# Altium PCB smd.PcbDoc
Units mm, origin at the board's own origin, x right, y up, seen from the top; angles counter-clockwise.
Board outline 152.4 x 101.6 mm, 2 copper layers (Top Layer, Bottom Layer); 61 components, 107 nets, 188 pads, 33 vias.
Unrouted connection lines stored in the file: 6.
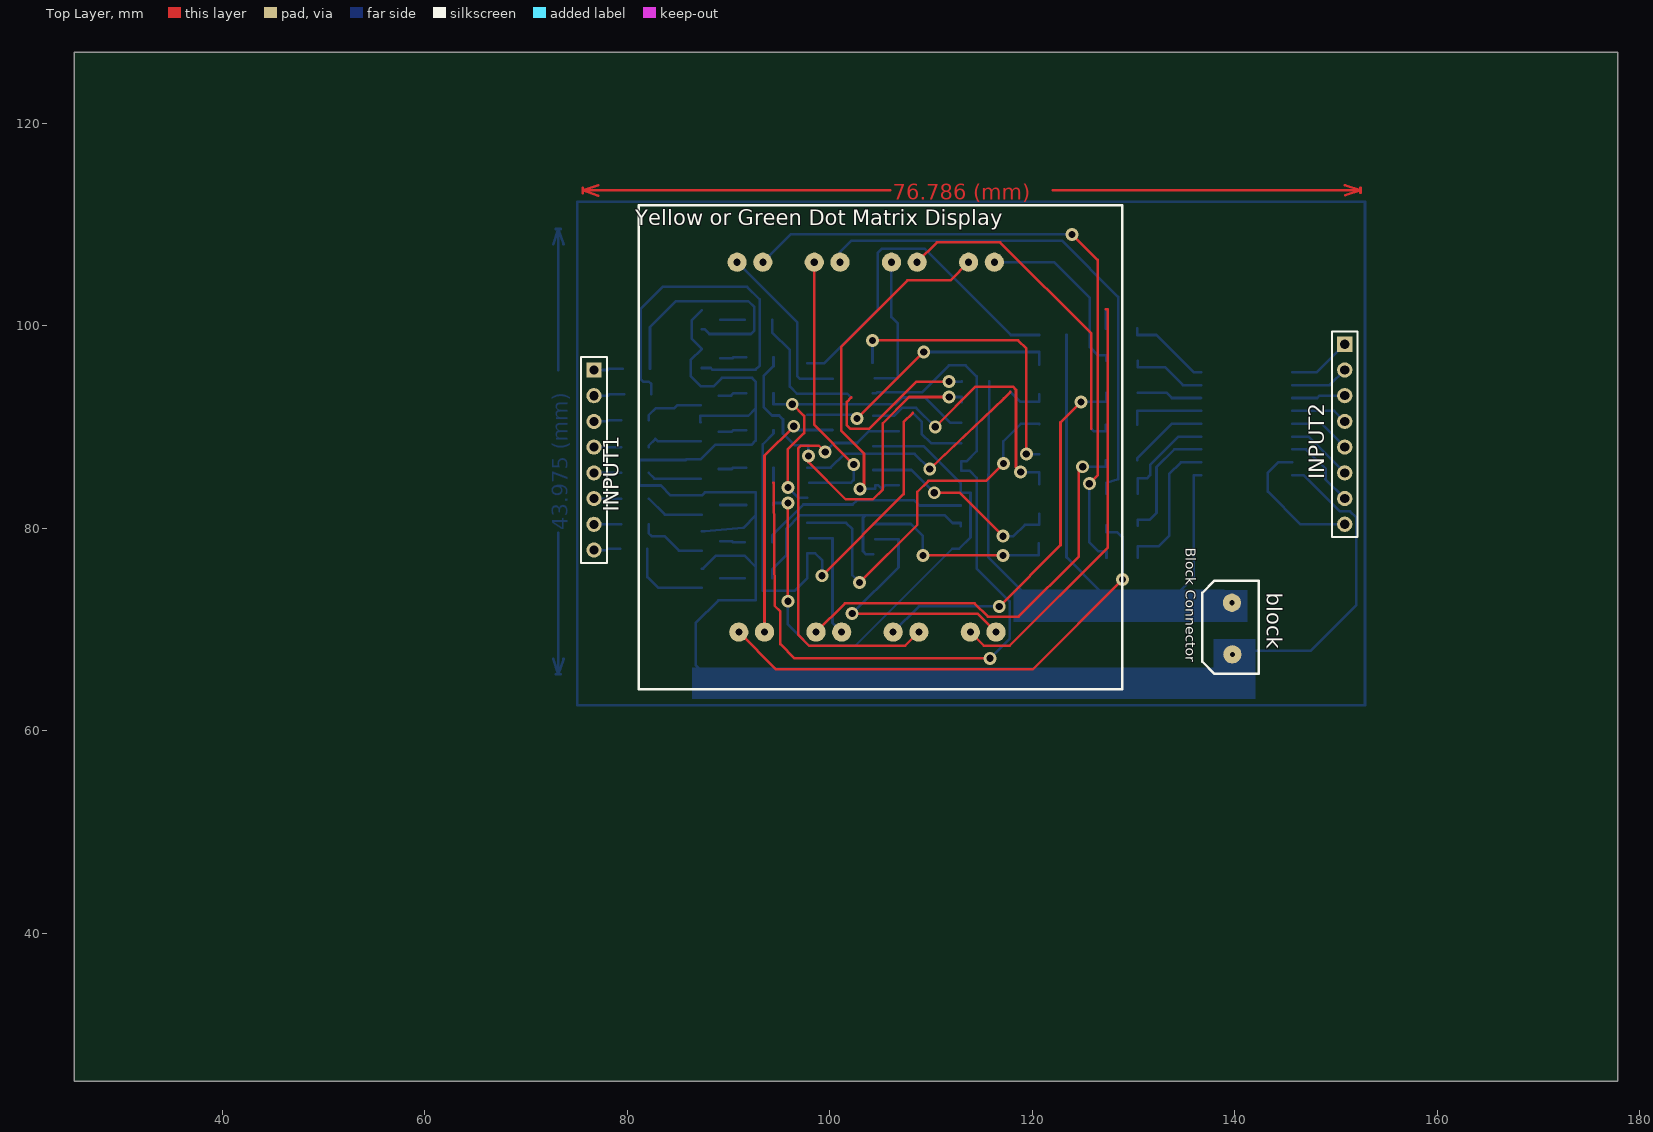
[diagram p0: Top Layer view]
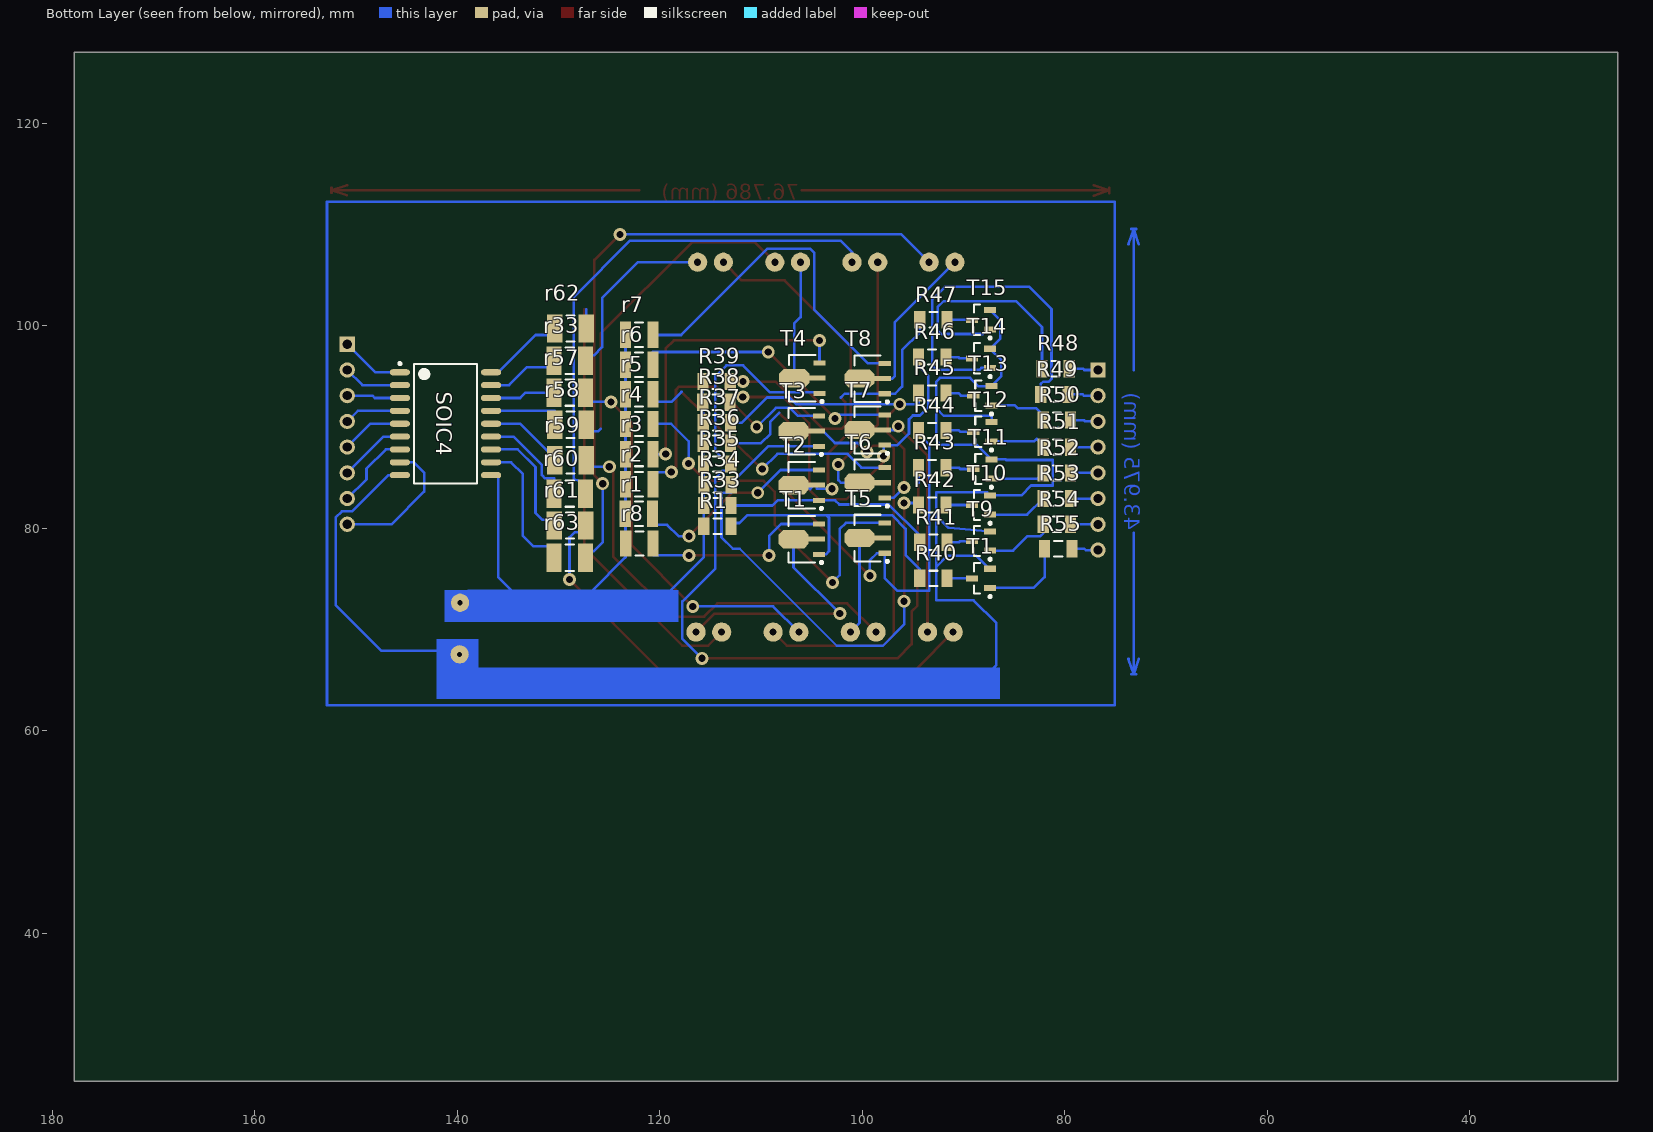
[diagram p1: Bottom Layer view, seen from below]

## Layer stack, top to bottom
Top Layer: signal copper 0.0356
Dielectric: dielectric 0.32, FR-4, Dk 4.8
Bottom Layer: signal copper 0.0356

## Board outline
25.4,25.4 177.8,25.4 177.8,127 25.4,127

## Design rules (kind name [scope] priority, off if disabled: settings)
Clearance [All] p1: gap=0.254
PolygonConnect [All] p1: connectstyle=Relief reliefconductorwidth=0.254 reliefentries=4 polygonreliefangle="90 Angle"
RoutingVias [All] p1: holewidth=0.711 width=1.27 viastyle="Through Hole" minholewidth=0.711 minwidth=1.27 maxholewidth=0.711 maxwidth=1.27
SilkscreenOverComponentPads [All] p1: minsilkscreentomaskgap=0.254
SolderMaskExpansion [All] p1: expansion=0.102
Width [All] p1: maxlimit=0.254 minlimit=0.254 preferedwidth=0.254
27 further rules are at their usual default settings.

## Components (designator, comment, footprint, x,y, rotation, side; value= is the part's Value field where it differs from the comment)
block "Comment" "PCB Block Connector" 139.725,70.1 r270 top
INPUT1 "Comment" HDR1X8 76.708,95.631 r270 top
INPUT2 "Comment" HDR1X8 150.85,98.175 r270 top
r1 "Comment" RESC3225L 122.05,81.425 r0 bottom
R1 "Comment" RESC3216L 114.299,80.206 r0 bottom
r2 "Comment" RESC3225L 122.025,84.35 r0 bottom
r3 "Comment" RESC3225L 122.025,87.325 r0 bottom
r4 "Comment" RESC3225L 122.025,90.3 r0 bottom
r5 "Comment" RESC3225L 122.025,93.225 r0 bottom
r6 "Comment" RESC3225L 122.025,96.15 r0 bottom
r7 "Comment" RESC3225L 122.025,99.1 r0 bottom
r8 "Comment" RESC3225L 122,78.5 r0 bottom
R33 "Comment" RESC3216L 114.3,82.25 r0 bottom
r33 "Comment" RESC3225M 128.875,96.55 r180 bottom
R34 "Comment" RESC3216L 114.275,84.3 r0 bottom
R35 "Comment" RESC3216L 114.325,86.35 r0 bottom
R36 "Comment" RESC3216L 114.35,88.4 r0 bottom
R37 "Comment" RESC3216L 114.35,90.425 r0 bottom
R38 "Comment" RESC3216L 114.4,92.45 r0 bottom
R39 "Comment" RESC3216L 114.375,94.5 r0 bottom
R40 "Comment" RESC3216L 92.964,75.057 r0 bottom
R41 "Comment" RESC3216L 92.964,78.613 r0 bottom
R42 "Comment" RESC3216L 93.091,82.296 r0 bottom
R43 "Comment" RESC3216L 93.091,85.979 r0 bottom
R44 "Comment" RESC3216L 93.091,89.662 r0 bottom
R45 "Comment" RESC3216L 93.091,93.345 r0 bottom
R46 "Comment" RESC3216L 93.091,96.901 r0 bottom
R47 "Comment" RESC3216L 92.964,100.584 r0 bottom
R48 "Comment" RESC3216L 80.899,95.758 r180 bottom
R49 "Comment" RESC3216L 81.026,93.218 r180 bottom
R50 "Comment" RESC3216L 80.772,90.678 r180 bottom
R51 "Comment" RESC3216L 80.772,88.011 r180 bottom
R52 "Comment" RESC3216L 80.772,85.471 r180 bottom
R53 "Comment" RESC3216L 80.772,82.931 r180 bottom
R54 "Comment" RESC3216L 80.772,80.391 r180 bottom
R55 "Comment" RESC3216L 80.645,77.978 r180 bottom
r57 "Comment" RESC3225M 128.875,93.4 r180 bottom
r58 "Comment" RESC3225M 128.8,90.225 r180 bottom
r59 "Comment" RESC3225M 128.8,86.725 r180 bottom
r60 "Comment" RESC3225M 128.875,83.425 r180 bottom
r61 "Comment" RESC3225M 128.85,80.275 r180 bottom
r62 "Comment" RESC3225M 128.8,99.725 r180 bottom
r63 "Comment" RESC3225M 128.875,77.1 r180 bottom
SOIC4 "Comment" SOIC127P1030-18L 141.15,90.325 r180 bottom
T1 "Comment" SOT89L 105.981,78.924 r0 bottom
T1 "Comment" SOT23-3L 88.265,75.057 r0 bottom
T2 "Comment" SOT89L 105.981,84.258 r0 bottom
T3 "Comment" SOT89L 105.981,89.592 r0 bottom
T4 "Comment" SOT89L 105.925,94.825 r0 bottom
T5 "Comment" SOT89L 99.47,79.035 r0 bottom
T6 "Comment" SOT89L 99.47,84.496 r0 bottom
T7 "Comment" SOT89L 99.47,89.703 r0 bottom
T8 "Comment" SOT89L 99.47,94.783 r0 bottom
T9 "Comment" SOT23-3L 88.265,78.74 r0 bottom
T10 "Comment" SOT23-3L 88.265,82.296 r0 bottom
T11 "Comment" SOT23-3L 88.138,85.852 r0 bottom
T12 "Comment" SOT23-3L 88.138,89.535 r0 bottom
T13 "Comment" SOT23-3L 88.138,93.091 r0 bottom
T14 "Comment" SOT23-3L 88.265,96.774 r0 bottom
T15 "Comment" SOT23-3L 88.265,100.584 r0 bottom
? "Comment" "Yellow or Green Dot Matrix DIsplay" 104.902,88.011 r0 top locked

## Footprints (in the part's own frame and the unit in brackets; to place one, negate y for a bottom-side part, rotate by r counter-clockwise, add the part's x,y. Pads: shape width x height; smd on the part's side, far side on the other; paste and mask are expansions set on the pad)
HDR1X8 [mm]
  rect 1.5x1.5 hole 0.9: 1(0,0)
  round 1.5 hole 0.9: 2(2.54,0) 3(5.08,0) 4(7.62,0) 5(10.16,0) 6(12.7,0) 7(15.24,0) 8(17.78,0)
  silkscreen extent -1.27,-1.27 19.05,1.27
"PCB Block Connector" [mm]
  round 1.8 hole 0.5: 1(-2.547,-0.023) 2(2.547,0.023)
  silkscreen extent -4.7,-2.94 4.45,2.65
RESC3216L [mm] "Chip Resistor, Body 3.2x1.6mm, IPC High Density"
  rect 1.1x1.7 smd: 1(-1.35,0) 2(1.35,0)
  silkscreen extent -0.4,-0.75 0.4,0.75, body extent -1.68,-0.87 1.68,0.87, height 0.71
RESC3225L [mm] "Chip Resistor, Body 3.2x2.5mm, IPC High Density"
  rect 1.1x2.6 smd: 1(-1.35,0) 2(1.35,0)
  silkscreen extent -0.4,-1.2 0.4,1.2, body extent -1.68,-1.32 1.68,1.32, height 0.71
RESC3225M [mm] "Chip Resistor, Body 3.2x2.5mm, IPC Low Density"
  rect 1.5x2.8 smd: 1(-1.55,0) 2(1.55,0)
  silkscreen extent -0.4,-1.3 0.4,1.3, body extent -1.68,-1.32 1.68,1.32, height 0.71
SOIC127P1030-18L [mm] "SOIC, 18-Leads, Body 11.6x7.5mm, Pitch 1.27mm, IPC High Density"
  oval 2x0.6 smd: 1(-4.5,5.08) 2(-4.5,3.81) 3(-4.5,2.54) 4(-4.5,1.27) 5(-4.5,0) 6(-4.5,-1.27) 7(-4.5,-2.54) 8(-4.5,-3.81) 9(-4.5,-5.08) 10(4.5,-5.08) 11(4.5,-3.81) 12(4.5,-2.54) 13(4.5,-1.27) 14(4.5,0) 15(4.5,1.27) 16(4.5,2.54) 17(4.5,3.81) 18(4.5,5.08)
  silkscreen extent -4.62,-5.9 3.1,6.05, body extent -3.8,-5.95 3.8,5.95, height 2.65
SOT23-3L [mm] "SOT23, 3-Leads, Body 2.9x1.3mm, Pitch 0.95mm, Lead Span 2.5mm, IPC High Density"
  rect 1.2x0.6 smd: 1(-0.9,0.95) 2(-0.9,-0.95) 3(0.9,0)
  silkscreen extent -1.02,-1.5 0.7,1.92, body extent -0.7,-1.5 0.7,1.5, height 1.1
SOT89L [mm] "SOT89, 3-Leads, Body 4.5x2.4 mm, Pitch 1.5mm, Lead Span 4.1mm, IPC High Density"
  rect 1.2x0.5 smd: 1(-1.7,1.5) 3(-1.7,-1.5)
  rect 1.6x0.5 smd: 2(-1.5,0)
  oct 3x1.8 smd: 2(0.8,0)
  silkscreen extent -2.07,-2.3 1.3,2.42, body extent -1.3,-2.3 1.3,2.3, height 1.6
"Yellow or Green Dot Matrix DIsplay" [mm] "Y or G Dot Matrix"
  round 1.9 hole 0.7: 3(-13.886,-18.262) 4(-11.346,-18.262) 6(-6.266,-18.262) 7(-3.726,-18.262) 9(1.354,-18.262) 10(3.894,-18.262) 12(8.974,-18.262) 13(11.514,-18.262) 20(11.346,18.262) 21(8.806,18.262) 23(3.726,18.262) 24(1.186,18.262) 26(-3.894,18.262) 27(-6.434,18.262) 29(-11.514,18.262) 30(-14.054,18.262)
  silkscreen extent -23.78,-23.9 23.99,23.89

## Via types
v1: diameter 1.27, hole 0.711, Top Layer to Bottom Layer, 33 vias

## Nets (pads, with @x,y where several pads share a name; then routed paths per layer and width w, separated by ;. In a path a pad name is that pad's centre, name@x,y a point inside that pad or via, vN(x,y) a via of type N, cw(c..) or ccw(c..) an arc to the next point about the centre after c; other vN are vias at no path point)
A1: r63.1 SOIC4.11 | length 14.4
  Bottom Layer w0.254: r63.1 130.425,78.232 132.486,78.232 133.502,79.248 133.502,85.344 134.673,86.515 SOIC4.11
A2: r61.1 SOIC4.12 | length 12.3
  Bottom Layer w0.254: r61.1 130.4,80.823 131.572,80.823 132.258,81.509 132.258,86.03 134.013,87.785 SOIC4.12
A3: r60.1 SOIC4.13 | length 10
  Bottom Layer w0.254: r60.1 130.425,84.938 131.318,84.938 131.623,85.242 131.623,86.233 134.445,89.055 SOIC4.13
A4: r59.1 SOIC4.14 | length 7.9
  Bottom Layer w0.254: r59.1 130.35,86.88 133.795,90.325 SOIC4.14
A5: r58.1 SOIC4.15 | length 7.7
  Bottom Layer w0.254: r58.1 130.35,91.595 SOIC4.15
A6: r57.1 SOIC4.16 | length 6.4
  Bottom Layer w0.254: r57.1 133.248,93.4 133.783,92.865 SOIC4.16
A7: r33.1 SOIC4.17 | length 7.6
  Bottom Layer w0.254: r33.1 130.425,95.91 133.096,95.91 134.871,94.135 SOIC4.17
A8: r62.1 SOIC4.18 | length 8.5
  Bottom Layer w0.254: r62.1 130.35,99.085 132.26,99.085 135.941,95.405 SOIC4.18
A9: 
A10: 
A11: 
A12: 
A13: 
A14: 
A15: 
A16: 
A17: 
A18: 
A19: 
A20: 
A21: 
A22: 
A23: 
A24: 
b1: R39.1 R47.2 T8.1 | length 30.2
  Top Layer w0.254: 102.108,92.913 101.676,92.481 101.676,90.17 102.032,89.814 103.886,89.814 108.56,94.488 v1(111.76,94.488)
  Bottom Layer w0.254: R47.2 94.314,99.336 96.063,97.587 96.063,93.98 96.76,93.283 T8.1 101.738,93.283 102.108,92.913 ; v1(111.76,94.488) 113.025,94.488 R39.1
b2: R38.1 R46.2 T7.1 | length 39
  Top Layer w0.254: v1(97.892,87.147) 97.892,86.538 101.575,82.855 104.242,82.855 105.232,83.845 105.232,90.371 107.825,92.964 v1(111.785,92.964)
  Bottom Layer w0.254: R46.2 94.441,96.012 93.497,95.068 93.497,91.948 94.31,91.135 94.996,91.135 95.377,90.754 95.377,89.346 96.52,88.203 T7.1 97.892,88.203 v1(97.892,87.147) ; v1(111.785,92.964) 113.05,92.964 R38.1
b3: R37.1 R45.2 T6.1 | length 32.7
  Top Layer w0.254: v1(95.86,84.023) 95.86,87.808 97.46,89.408 97.46,91.084 v1(96.291,92.253)
  Bottom Layer w0.254: R45.2 94.441,92.253 v1(96.291,92.253) 106.528,92.253 107.188,92.913 109.398,92.913 111.887,90.424 R37.1 ; v1(95.86,84.023) 96.887,82.996 T6.1
b4: R36.1 R44.2 T5.1 | length 53.5
  Top Layer w0.254: v1(99.238,75.311) 107.29,83.363 107.29,90.475 108.204,91.389
  Bottom Layer w0.254: R44.2 94.441,89.357 93.383,88.299 93.383,73.812 96.52,73.812 97.77,75.062 T5.1 98.552,77.535 99.238,76.849 v1(99.238,75.311) ; 108.204,91.389 109.068,90.526 109.068,89.332 109.999,88.4 R36.1
b5: R35.1 R43.2 T4.1 | length 82.9
  Top Layer w0.254: 94.441,84.51 94.459,84.51 94.564,72.333 95.117,71.78 95.117,68.56 96.52,67.158 v1(115.824,67.158)
  Bottom Layer w0.254: 94.441,84.51 R43.2 ; T4.1 104.572,93.325 104.668,93.421 109.093,93.421 111.76,96.088 113.411,96.088 114.503,94.996 114.503,87.605 113.538,86.639 112.975,86.639 R35.1 112.975,85.7 113.792,85.7 114.503,84.988 114.503,76.022 117.754,72.771 117.754,69.088 v1(115.824,67.158)
b6: R34.1 R42.2 T3.1 | length 53.4
  Top Layer w0.254: v1(95.86,72.796) v1(95.86,82.499)
  Bottom Layer w0.254: R42.2 94.441,82.499 v1(95.86,82.499) ; v1(95.86,72.796) 95.86,70.51 97.968,68.402 102.514,68.402 112.09,77.978 112.776,77.978 113.894,79.096 113.894,83.49 112.925,83.49 R34.1 112.925,84.455 109.288,88.092 T3.1
b7: R33.1 R41.2 T2.1 | length 21
  Bottom Layer w0.254: R41.2 94.314,79.277 97.384,82.347 102.256,82.347 102.667,82.758 T2.1 108.356,82.758 108.864,82.25 R33.1
b8: R1.1 R40.2 T1.1@104.281,77.424 | length 28.7
  Bottom Layer w0.254: R40.2 94.314,75.946 95.707,77.339 95.707,79.952 97.061,81.305 103.556,81.305 ; T1.1@104.281,77.424 103.591,77.424 103.276,77.739 103.276,81.026 103.556,81.305 ; R1.1 112.949,80.518 112.116,80.518 111.328,81.305 103.556,81.305
c1: ?.30 T8.2 | length 17.3
  Bottom Layer w0.254: ?.30 96.774,100.347 96.774,95.037 97.028,94.783 97.97,94.783 T8.2@100.27,94.783
c2: ?.4 T7.2 | length 25.5
  Top Layer w0.254: ?.4 93.556,87.18 v1(96.444,90.068)
  Bottom Layer w0.254: v1(96.444,90.068) 96.809,89.703 97.97,89.703 T7.2@100.27,89.703
c3: ?.27 T6.2 | length 27.6
  Top Layer w0.254: ?.27 98.468,90.203 v1(102.362,86.309)
  Bottom Layer w0.254: T6.2@97.97,84.496 100.27,84.496 102.108,84.496 102.362,84.75 v1(102.362,86.309)
c4: ?.7 T5.2 | length 12
  Bottom Layer w0.254: T5.2@97.97,79.035 100.27,79.035 100.27,70.655 ?.7
c5: ?.24 T4.2 | length 14
  Bottom Layer w0.254: T4.2@104.425,94.825 106.725,94.825 106.725,100.228 106.088,100.865 ?.24
c6: ?.10 T3.2 | length 42.5
  Top Layer w0.254: v1(99.543,87.528) 98.908,88.163 97.155,88.163 96.876,87.884 96.876,69.494 97.968,68.402 107.449,68.402 ?.10
  Bottom Layer w0.254: v1(99.543,87.528) 100.432,88.417 102.692,88.417 103.867,89.592 104.481,89.592 T3.2@106.781,89.592
c7: ?.21 T2.2 | length 35.7
  Top Layer w0.254: v1(102.972,83.896) 103.378,84.303 103.378,87.376 101.117,89.637 101.117,97.917 107.671,104.47 111.906,104.47 ?.21
  Bottom Layer w0.254: v1(102.972,83.896) 104.481,83.896 104.481,84.258 104.754,84.258 105.138,83.874 105.523,84.258 T2.2@106.781,84.258
c8: ?.13 T1.2@104.481,78.924 T1.2@106.781,78.924 | length 26.5
  Top Layer w0.254: v1(102.21,71.577) 114.587,71.577 ?.13
  Bottom Layer w0.254: v1(102.21,71.577) 106.782,76.149 106.782,78.924 T1.2@104.481,78.924
COM: block.1 r1.2 R1.2 r2.2 r3.2 r4.2 r5.2 r6.2 r7.2 r8.2 R33.2 R34.2 R35.2 R36.2 R37.2 R38.2 R39.2 SOIC4.10 | length 88.2
  Bottom Layer w0.254: R39.2 115.725,93.472 115.75,93.447 R38.2 115.75,91.439 115.7,91.389 R37.2 R36.2 115.7,87.376 115.675,87.351 R35.2 115.675,85.343 115.625,85.293 R34.2 115.625,83.286 115.65,83.261 R33.2 115.65,81.205 115.649,81.204 R1.2 115.649,77.137 118.974,73.812 126.703,73.812 ; r8.2 123.35,77.165 123.375,77.14 ; r7.2 r6.2 r5.2 r4.2 r3.2 r2.2 123.375,77.14 ; r1.2 123.4,77.115 ; SOIC4.10 135.941,85.245 135.941,75.184 134.569,73.812 ; block.1@139.702,73.022 138.912,73.812 134.569,73.812 ; 123.375,77.14 123.4,77.115 ; 123.4,77.115 126.703,73.812 ; 126.703,73.812 134.569,73.812
e1: r7.1 T8.3 | length 34.4
  Bottom Layer w0.254: T8.3 99.416,96.283 104.75,101.617 104.75,107.213 105.156,107.62 109.347,107.62 117.881,99.085 120.675,99.085 r7.1
e2: r6.1 T7.3 | length 27
  Top Layer w0.254: v1(102.692,90.83) v1(109.271,97.409)
  Bottom Layer w0.254: T7.3 102.32,91.203 v1(102.692,90.83) ; v1(109.271,97.409) 120.675,97.409 r6.1
e3: r5.1 T6.3 | length 28.3
  Top Layer w0.254: v1(109.872,85.861) 117.187,92.829 117.831,93.472
  Bottom Layer w0.254: T6.3 100.076,85.996 101.431,87.351 108.382,87.351 v1(109.872,85.861) ; 117.831,93.472 117.856,93.472 118.847,92.481 120.675,92.481 r5.1
e4: r4.1 T5.3 | length 37.7
  Top Layer w0.254: v1(102.946,74.651) 108.636,80.34 108.636,83.591 109.728,84.684 115.418,84.684 v1(117.145,86.411)
  Bottom Layer w0.254: T5.3 101.608,80.535 102.235,79.908 102.235,75.362 v1(102.946,74.651) ; v1(117.145,86.411) 117.145,88.595 118.872,90.322 120.675,90.322 r4.1
e5: r3.1 T4.3 | length 29.4
  Top Layer w0.254: v1(104.216,98.552) 118.593,98.552 119.405,97.739 v1(119.405,87.325)
  Bottom Layer w0.254: v1(104.216,98.552) 104.216,96.325 T4.3 ; v1(119.405,87.325) r3.1
e6: r2.1 T3.3 | length 28.3
  Top Layer w0.254: v1(110.414,90.018) 114.376,93.98 118.085,93.98 118.389,93.675 118.389,86.004 v1(118.847,85.547)
  Bottom Layer w0.254: T3.3 106.332,91.092 107.137,91.897 108.534,91.897 v1(110.414,90.018) ; v1(118.847,85.547) 120.675,85.547 r2.1
e7: r1.1 T2.3 | length 20.7
  Top Layer w0.254: v1(110.312,83.515) 112.801,83.515 v1(117.094,79.223)
  Bottom Layer w0.254: T2.3 108.069,85.758 v1(110.312,83.515) ; v1(117.094,79.223) 118.135,79.223 119.253,80.34 120.7,80.34 r1.1
e8: r8.1 T1.3@104.281,80.424 | length 20
  Top Layer w0.254: v1(109.195,77.318) v1(117.094,77.318)
  Bottom Layer w0.254: T1.3@104.281,80.424 108.019,80.424 109.195,79.248 v1(109.195,77.318) ; v1(117.094,77.318) 120.65,77.318 r8.1
GND: block.2 SOIC4.9 T1.2@87.365,76.007 T9.2 T10.2 T11.2 T12.2 T13.2 T14.2 T15.2 | length 169.6
  Bottom Layer w0.254: T12.2 87.224,90.485 87.224,91.11 91.948,91.11 92.685,91.846 ; T1.2@87.365,76.007 87.478,76.007 88.763,77.292 91.592,77.292 92.685,76.2 ; T9.2 87.655,79.69 91.465,80.035 92.685,81.255 ; T15.2 86.36,100.529 86.36,98.729 T14.2 86.258,96.617 86.258,95.021 T13.2 88.544,94.041 89.347,94.844 92.329,94.844 92.685,94.488 92.685,91.846 ; 137.045,65.225 88.025,65.225 86.75,66.5 86.75,70.625 89.008,72.883 92.685,72.883 92.685,76.2 ; block.2@139.748,67.928 147.502,67.928 151.994,72.419 151.994,81.051 151.384,81.661 150.368,81.661 146.784,85.245 SOIC4.9 ; 92.685,76.2 92.685,81.255 ; 92.685,81.255 92.685,83.541 87.66,83.541 T10.2 84.292,83.246 83.312,84.226 81.178,84.226 81.178,86.741 85.776,86.741 85.837,86.802 T11.2 88.676,88.24 92.278,88.24 92.685,88.646 92.685,91.846
I1: INPUT1.1 R48.2 | length 2.9
  Bottom Layer w0.254: INPUT1.1 78.054,95.631 78.181,95.758 R48.2
I2: INPUT1.2 R49.2 | length 3
  Bottom Layer w0.254: INPUT1.2 78.105,93.091 78.232,93.218 R49.2
I3: INPUT1.3 R50.2 | length 2.8
  Bottom Layer w0.254: INPUT1.3 77.978,90.551 78.105,90.678 R50.2
I4: INPUT1.4 R51.2 | length 2.7
  Bottom Layer w0.254: INPUT1.4 R51.2
I5: INPUT1.5 R52.2 | length 2.7
  Bottom Layer w0.254: INPUT1.5 R52.2
I6: INPUT1.6 R53.2 | length 2.7
  Bottom Layer w0.254: INPUT1.6 R53.2
I7: INPUT1.7 R54.2 | length 2.7
  Bottom Layer w0.254: INPUT1.7 R54.2
I8: INPUT1.8 R55.2 | length 2.6
  Bottom Layer w0.254: INPUT1.8 77.927,77.851 78.054,77.978 R55.2
I9: INPUT2.1 SOIC4.1 | length 6.3
  Bottom Layer w0.254: SOIC4.1 148.08,95.405 INPUT2.1
I10: INPUT2.2 SOIC4.2 | length 5.8
  Bottom Layer w0.254: SOIC4.2 149.35,94.135 INPUT2.2
I11: INPUT2.3 SOIC4.3 | length 5.3
  Bottom Layer w0.254: SOIC4.3 148.133,92.865 148.363,93.095 INPUT2.3
I12: INPUT2.4 SOIC4.4 | length 5.6
  Bottom Layer w0.254: SOIC4.4 149.81,91.595 INPUT2.4
I13: INPUT2.5 SOIC4.5 | length 6.2
  Bottom Layer w0.254: SOIC4.5 148.54,90.325 INPUT2.5
I14: INPUT2.6 SOIC4.6 | length 6.7
  Bottom Layer w0.254: SOIC4.6 147.27,89.055 INPUT2.6
I15: INPUT2.7 SOIC4.7 | length 7.8
  Bottom Layer w0.254: SOIC4.7 147.041,87.785 148.946,85.88 148.946,84.839 INPUT2.7
I16: INPUT2.8 SOIC4.8 | length 13.6
  Bottom Layer w0.254: SOIC4.8 144.272,86.515 143.256,85.499 143.256,83.617 146.478,80.395 INPUT2.8
I17: 
I18: 
I19: 
I20: 
I21: 
I22: 
I23: 
I24: 
I25: 
I26: 
I27: 
I28: 
I29: 
I30: 
I31: 
I32: 
NewNet: 
r1: R48.1 T15.1 | length 23.5
  Bottom Layer w0.254: R48.1 82.249,99.873 84.814,102.438 91.948,102.438 92.558,101.829 92.558,99.543 92.202,99.187 88.102,99.187 87.655,99.634 T15.1
r2: R49.1 T14.1 | length 34.9
  Bottom Layer w0.254: R49.1 82.376,94.234 82.122,94.488 81.559,94.488 81.305,94.742 81.305,101.651 83.49,103.835 91.846,103.835 93.066,102.616 93.066,96.037 92.685,95.656 88.392,95.656 88.224,95.824 T14.1
r3: R50.1 T13.1 | length 6
  Bottom Layer w0.254: R50.1 82.122,91.164 82.829,91.872 84.658,91.872 84.927,92.141 T13.1
r4: R51.1 T12.1 | length 5.6
  Bottom Layer w0.254: R51.1 82.122,88.163 82.782,88.824 83.021,88.585 T12.1
r5: R52.1 T11.1 | length 5.4
  Bottom Layer w0.254: R52.1 82.691,84.902 T11.1
r6: R53.1 T10.1 | length 5.9
  Bottom Layer w0.254: R53.1 83.707,81.346 T10.1
r7: R54.1 T9.1 | length 6.8
  Bottom Layer w0.254: R54.1 82.122,79.502 82.401,79.223 83.668,79.223 85.1,77.79 T9.1
r8: R55.1 T1.1@87.365,74.107 | length 8.6
  Bottom Layer w0.254: R55.1 81.995,75.184 83.072,74.107 T1.1@87.365,74.107
r9: R47.1 T15.3 | length 2.4
  Bottom Layer w0.254: T15.3 R47.1
r10: R46.1 T14.3 | length 2.6
  Bottom Layer w0.254: T14.3 90.373,96.774 90.5,96.901 R46.1
r11: R45.1 T13.3 | length 2.8
  Bottom Layer w0.254: T13.3 90.246,93.091 90.5,93.345 R45.1
r12: R44.1 T12.3 | length 2.8
  Bottom Layer w0.254: T12.3 90.322,89.535 90.449,89.662 R44.1
r13: R43.1 T11.3 | length 2.8
  Bottom Layer w0.254: T11.3 90.322,85.852 90.449,85.979 R43.1
r14: R42.1 T10.3 | length 2.6
  Bottom Layer w0.254: T10.3 R42.1
r15: R41.1 T9.3 | length 2.5
  Bottom Layer w0.254: T9.3 90.322,78.74 90.449,78.613 R41.1
r16: R40.1 T1.3@89.165,75.057 | length 2.4
  Bottom Layer w0.254: T1.3@89.165,75.057 R40.1
r17: ?.12 r62.2 | length 43.8
  Top Layer w0.254: ?.12 115.222,68.402 117.754,68.402 127.457,78.105 127.457,101.647 127.25,101.647
  Bottom Layer w0.254: r62.2 127.25,101.647
r18: ?.20 r33.2 | length 18.3
  Bottom Layer w0.254: ?.20 122.149,106.273 125.679,102.742 125.679,97.892 126.492,97.079 127.325,97.079 r33.2
r19: ?.9 r57.2 | length 38.5
  Top Layer w0.254: v1(116.738,72.288) 122.784,78.334 122.784,90.449 v1(124.816,92.481)
  Bottom Layer w0.254: ?.9 108.795,72.288 v1(116.738,72.288) ; v1(124.816,92.481) 127.325,92.481 r57.2
r20: ?.23 r58.2 | length 33.3
  Top Layer w0.254: ?.23 110.585,108.229 116.815,108.229 125.832,99.212 125.832,89.814
  Bottom Layer w0.254: 125.832,89.814 126.06,89.586 127.25,89.586 r58.2
r21: ?.6 r59.2 | length 42.1
  Top Layer w0.254: ?.6 101.48,72.593 114.3,72.593 115.621,71.272 118.643,71.272 124.595,77.224 124.595,85.707 v1(124.969,86.081)
  Bottom Layer w0.254: v1(124.969,86.081) 127.25,86.081 r59.2
r22: ?.26 r60.2 | length 51.5
  Bottom Layer w0.254: ?.26 101.008,107.282 102.133,108.407 122.918,108.407 128.473,102.852 128.473,84.836 127.325,84.48 r60.2
r23: ?.3 r61.2 | length 49.7
  Top Layer w0.254: ?.3 94.699,66.065 120.04,66.065 v1(128.905,74.93)
  Bottom Layer w0.254: r61.2 127.3,79.629 128.372,79.629 128.905,79.096 v1(128.905,74.93)
r24: ?.29 r63.2 | length 66.2
  Top Layer w0.254: v1(123.927,109.017) 126.441,106.502 126.441,85.217 v1(125.628,84.404)
  Bottom Layer w0.254: ?.29 96.132,109.017 v1(123.927,109.017) ; v1(125.628,84.404) 125.628,78.613 126.492,77.749 127.325,77.749 r63.2
copper on no net: | length 358.4
  Top Layer w0.254: 75.614,113.107 75.614,113.615 ; 77.138,112.853 75.614,113.361 ; 77.138,113.869 75.614,113.361 ; 105.983,113.367 75.614,113.361 ; 122.031,113.369 152.4,113.375 ; 150.876,112.867 152.4,113.375 ; 150.876,113.883 152.4,113.375 ; 152.4,113.121 152.4,113.629
  Bottom Layer w0.254: 72.692,67.099 73.2,65.575 ; 72.692,108.026 73.2,109.55 ; 72.946,65.575 73.454,65.575 ; 72.946,109.55 73.454,109.55 ; 73.2,79.539 73.2,65.575 ; 73.2,95.586 73.2,109.55 ; 73.708,67.099 73.2,65.575 ; 73.708,108.026 73.2,109.55 ; 75.05,112.25 75.05,62.525 152.85,62.525 152.85,112.25 75.2,112.25

## Other copper
Top Layer:
  text "76.786 (mm)" at 106.237,112.452 h1.52 r0.01
Bottom Layer:
  rectangle net COM: 118.15,70.75 141.225,73.925
  rectangle net GND: 137.875,63.15 142.05,69.05
  rectangle net GND: 86.4,63.15 141.225,66.25
  text "43.975 (mm)" at 74.114,79.793 h1.52 r90

## Text inside footprints (layer, text, board x,y; h text height)
block: Top Overlay "Block Connector" at 135.153,78.101 h1.02 r270
?: Top Overlay "Yellow or Green Dot Matrix Display" at 80.8,109.9 h1.52